# EAGLE board temp_RH_loggers_V2 (EAGLE 9.7.0)
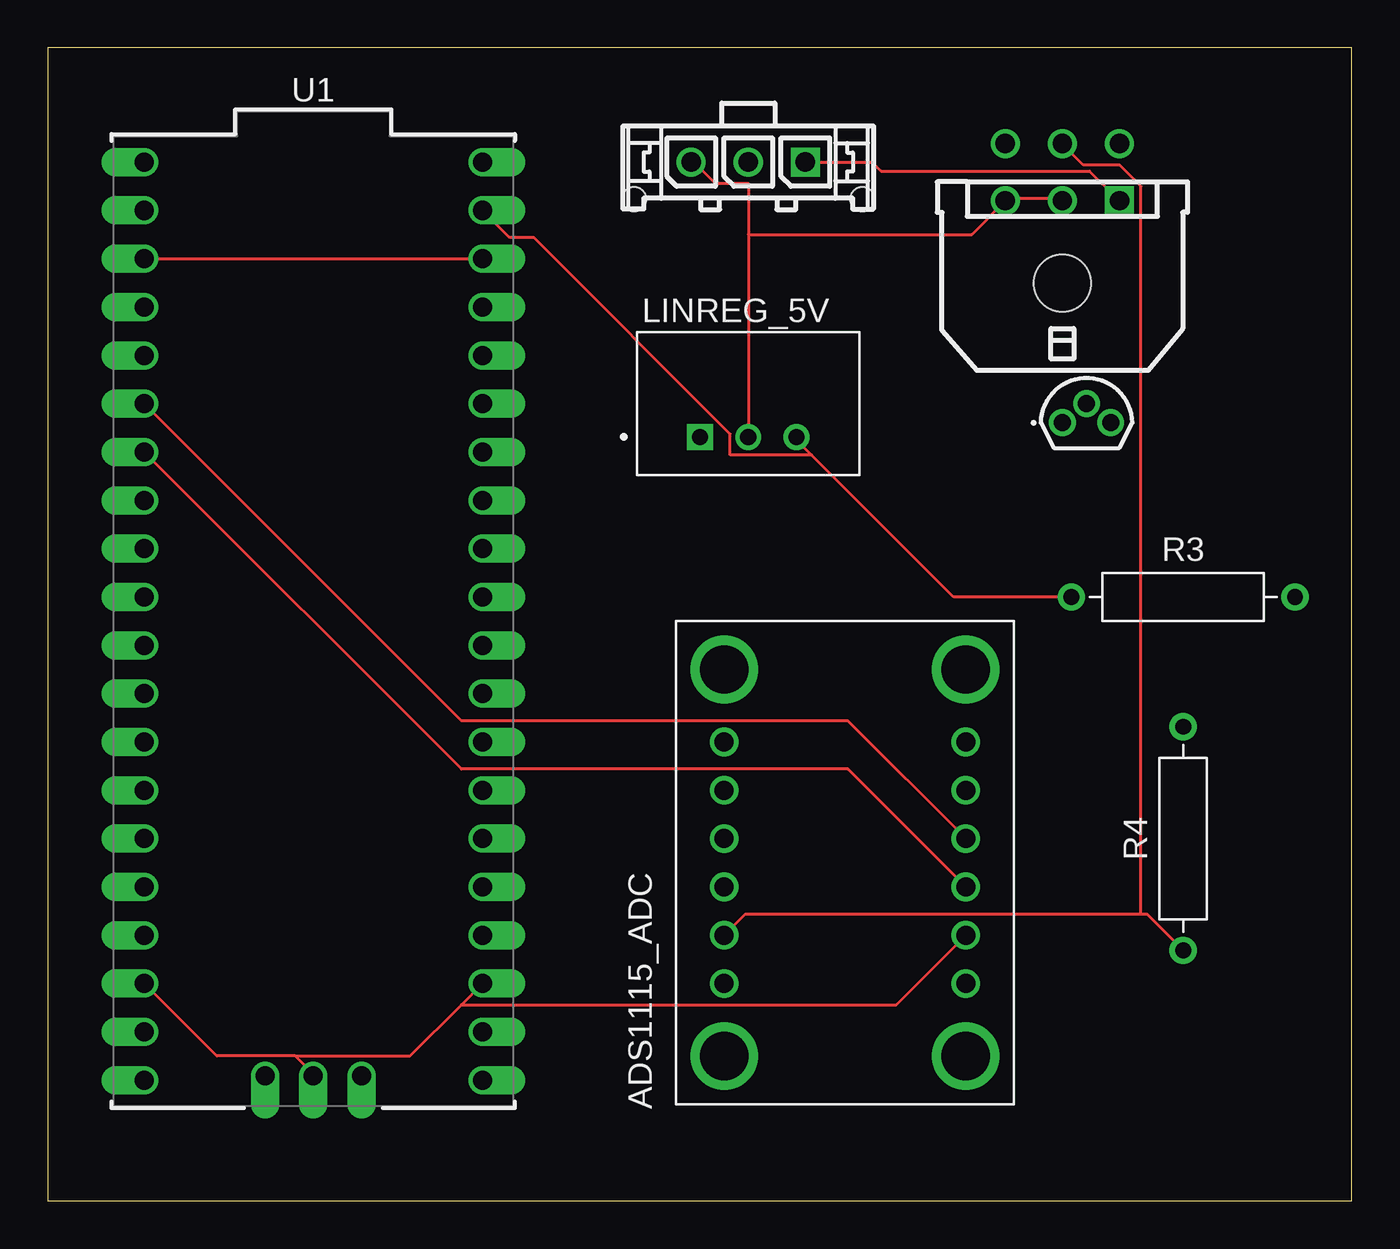
[diagram p0: board, top side]
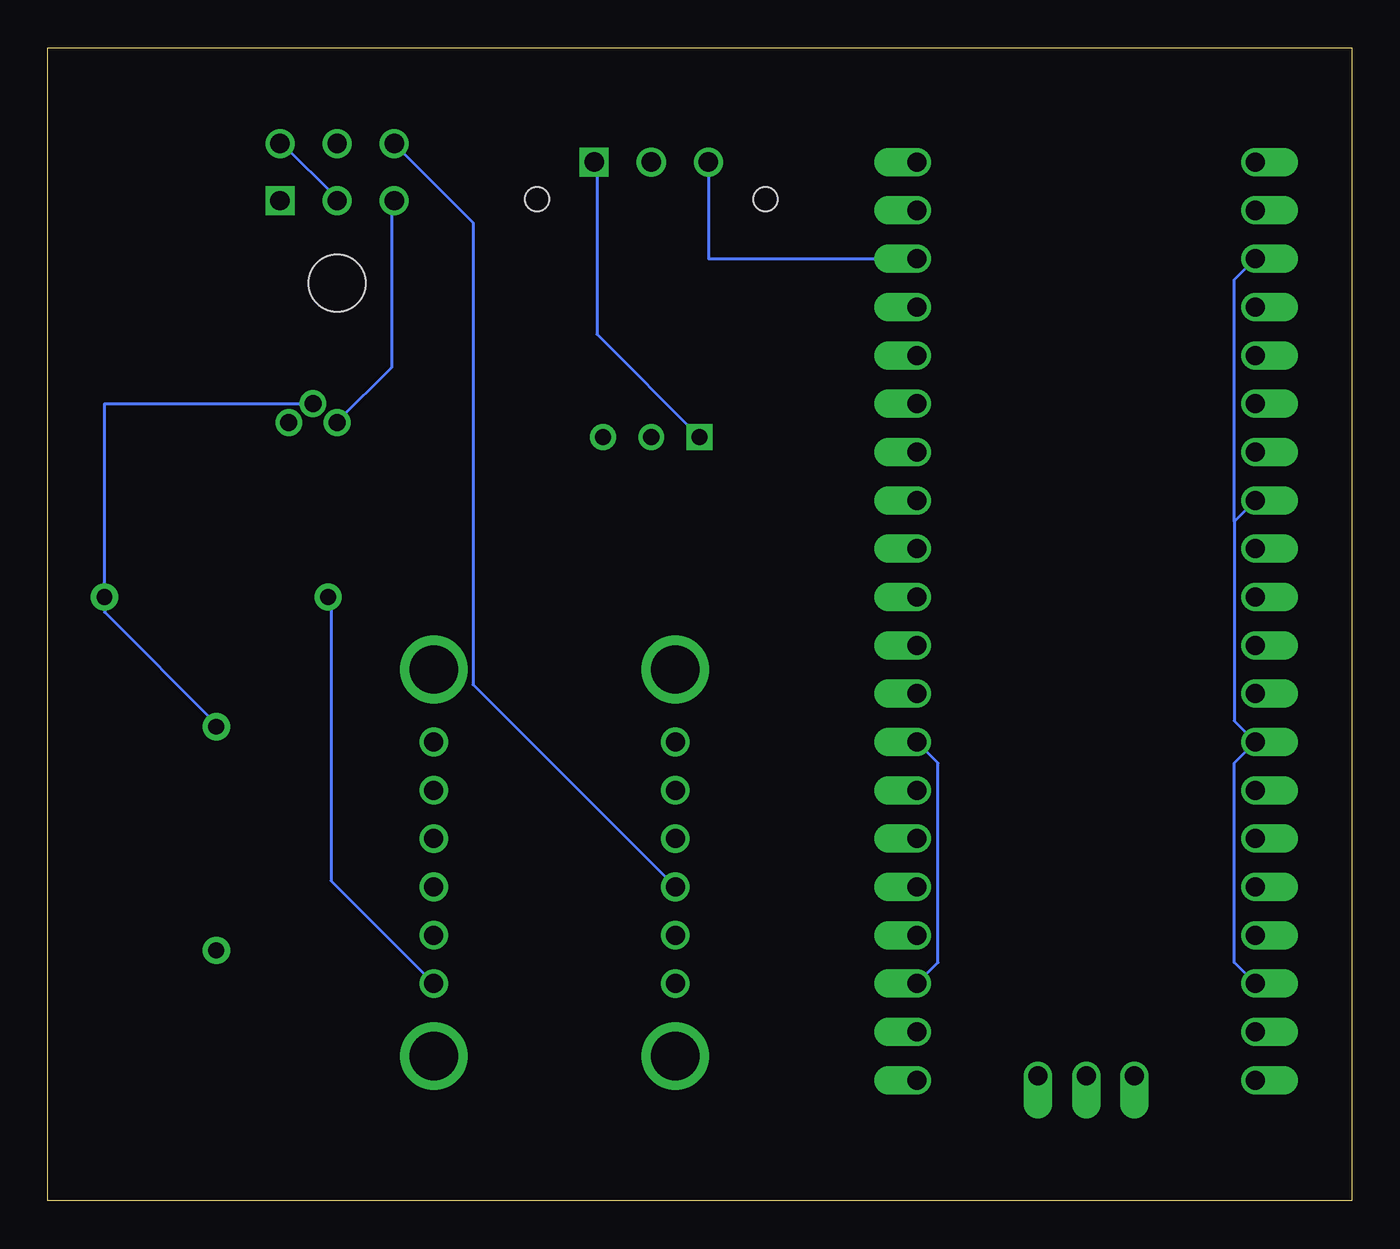
[diagram p1: board, bottom side, seen from below]

Size 68.56 x 60.63 mm. Coordinates in mm from the lower left corner, seen from the top.
Outline: 0,0 68.56,0 68.56,60.63 0,60.63 0,0
Copper layers (1*16): Top 0.035mm / dielectric 1.5mm / Bottom 0.035mm
Design rules "Fusion Electronics Design Rules": minimum track width 6mil, minimum drill 0.35mm, track to track 6mil, track to pad 6mil, pad to pad 6mil, via to via 6mil, smd to smd 6mil, copper to edge 40mil, drill to drill 6mil, minimum pad ring 10mil, minimum via ring 8mil, stop-mask expansion 4mil, vias tented up to drill 9999mil, thermal gap 10mil

## Footprints (pad centres in the part's own frame; a part is rotated, then mirrored left to right if it is on the bottom)
MODULE_1085 = drill 1: JP1_1 -6.35,6.35; JP1_2 -3.81,6.35; JP1_3 -1.27,6.35; JP1_4 1.27,6.35; JP1_5 3.81,6.35; JP1_6 6.35,6.35; JP2_1 -6.35,-6.35; JP2_2 -3.81,-6.35; JP2_3 -1.27,-6.35; JP2_4 1.27,-6.35; JP2_5 3.81,-6.35; JP2_6 6.35,-6.35 | drill 2.54: SH1 -10.16,6.35; SH2 10.16,6.35; SH3 -10.16,-6.35; SH4 10.16,-6.35
LP0003A = drill 0.9 pad 1.4: 1 -1.27,-1; 2 0,0; 3 1.27,-1
CONV_TSR_1-2450 = drill 0.85 square: 1 -2.54,-1.75 | drill 0.85: 2 0,-1.75; 3 2.54,-1.75
43650-0315 = drill 1.02 square: P$1 3,0 | drill 1.02: P$2 0,0; P$3 -3,0 | hole 1.27: 6,-1.96; -6,-1.96
RESAD1176W63L850D250B = drill 0.83 pad 1.43: 1 -5.88,0; 2 5.88,0
43045-0600 = drill 1.02 square: P$1 3,4.32 | drill 1.02: P$2 0,4.32; P$3 -3,4.32; P$4 3,7.32; P$5 0,7.32; P$6 -3,7.32 | hole 3: 0,0
PI_PICO_H = drill 1 offset: 1 -8.89,24.13; 2 -8.89,21.59; 3 -8.89,19.05; 4 -8.89,16.51; 5 -8.89,13.97; 6 -8.89,11.43; 7 -8.89,8.89; 8 -8.89,6.35; 9 -8.89,3.81; 10 -8.89,1.27; 11 -8.89,-1.27; 12 -8.89,-3.81; 13 -8.89,-6.35; 14 -8.89,-8.89; 15 -8.89,-11.43; 16 -8.89,-13.97; 17 -8.89,-16.51; 18 -8.89,-19.05; 19 -8.89,-21.59; 20 -8.89,-24.13; 21 8.89,-24.13; 22 8.89,-21.59; 23 8.89,-19.05; 24 8.89,-16.51; 25 8.89,-13.97; 26 8.89,-11.43; 27 8.89,-8.89; 28 8.89,-6.35; 29 8.89,-3.81; 30 8.89,-1.27; 31 8.89,1.27; 32 8.89,3.81; 33 8.89,6.35; 34 8.89,8.89; 35 8.89,11.43; 36 8.89,13.97; 37 8.89,16.51; 38 8.89,19.05; 39 8.89,21.59; 40 8.89,24.13; D1 -2.54,-23.9; D2 0,-23.9; D3 2.54,-23.9

## Placement (x,y rotation side)
ADS1115_ADC  1085  [MODULE_1085]  41.91,17.78 90 top
IC1  LM4040AIZ-2.5_NOPB  [LP0003A]  54.61,41.91 0 top
LINREG_5V  TSR_1-2450  [CONV_TSR_1-2450]  36.83,41.91 0 top
POWER_HEADER  [43650-0315]  36.83,54.61 0 top
R3  4700  [RESAD1176W63L850D250B]  59.69,31.75 0 top
R4  18700  [RESAD1176W63L850D250B]  59.69,19.05 90 top
TEMP/RH_HEADER  [43045-0600]  53.34,48.26 0 top
U1  RPI_PICO_H  [PI_PICO_H]  13.97,30.48 0 top

## Library data of the parts
ADS1115_ADC = 1085; AVAILABILITY: In Stock; CHECK_PRICES: https://www.snapeda.com/parts/1085/Adafruit+Industries/view-part/?ref=eda; DESCRIPTION: ADS1115 series 16 Bit 860 Samples per Second Analog to Digital Converter (ADC) Evaluation Board; MF: Adafruit Industries; MP: 1085; PACKAGE: NON STANDARD-16 Adafruit; PRICE: None; PURCHASE-URL: https://www.snapeda.com/api/url_track_click_mouser/?unipart_id=378491&manufacturer=Adafruit Industries&part_name=1085&search_term=None; SNAPEDA_LINK: https://www.snapeda.com/parts/1085/Adafruit+Industries/view-part/?ref=snap
IC1 = LM4040AIZ-2.5_NOPB; DESCRIPTION: 100-ppm/C precision micropower shunt voltage reference; HEIGHT: mm; MANUFACTURER_NAME: Texas Instruments; MANUFACTURER_PART_NUMBER: LM4040AIZ-2.5/NOPB; MOUSER_PART_NUMBER: 926-LM4040AIZ25NOPB; MOUSER_PRICE-STOCK: https://www.mouser.co.uk/ProductDetail/Texas-Instruments/LM4040AIZ-2.5-NOPB?qs=QbsRYf82W3Ggji8pDqIALQ%3D%3D
LINREG_5V = TSR_1-2450; AVAILABILITY: In Stock; CHECK_PRICES: https://www.snapeda.com/parts/TSR%201-2450/Traco+Power/view-part/?ref=eda; DESCRIPTION: 1 Amp POL switching regulator, wide input range, pos.-pos. circuit, LM78 compatible, SIP-3; MF: Traco Power; MP: TSR 1-2450; PACKAGE: SIP-3 Traco Power; PRICE: None; PURCHASE-URL: https://www.snapeda.com/api/url_track_click_mouser/?unipart_id=45147&manufacturer=Traco Power&part_name=TSR 1-2450&search_term=None; SNAPEDA_LINK: https://www.snapeda.com/parts/TSR%201-2450/Traco+Power/view-part/?ref=snap
POWER_HEADER TEMP/RH_HEADER = con-molex-micro-fit-3_0
R3 R4 = Resistor; CATEGORY: Resistors; DESCRIPTION: Axial Resistor 11.76 mm pitch 8.5 mm body length 2.5 mm body diameter; PACKAGE_SIZE: AXIAL; PACKAGE_TYPE: THT
U1 = Development_Boards; CATEGORY_L1: Developement Boards; CATEGORY_L2: Evaluation Boards; DATASHEET: https://pip-assets.raspberrypi.com/categories/610-raspberry-pi-pico/documents/RP-008307-DS-1-pico-datasheet.pdf?disposition=inline; DESCRIPTION: RP2040 Raspberry Pi Pico - ARM® Cortex®-M0+ MCU 32-Bit Embedded Evaluation Board; MANUFACTURER: Raspberry Pi; MPN: SC0917; OPERATING_TEMPERATURE: -20°C ~ 85°C; PACKAGE: Through Hole; PART_STATUS: Active; ROHS: Compliant; SERIES: RP2040

## Nets
+3.3V: U1.36
+5V: ADS1115_ADC.JP2_1 LINREG_5V.3 R3.1 U1.39
+12V: LINREG_5V.1 POWER_HEADER.P$1 TEMP/RH_HEADER.P$1
ADC_VREF: U1.35
AGND: U1.33
GND: ADS1115_ADC.JP2_2 IC1.1 LINREG_5V.2 POWER_HEADER.P$3 TEMP/RH_HEADER.P$2 TEMP/RH_HEADER.P$3 TEMP/RH_HEADER.P$4 U1.3 U1.8 U1.13 U1.18 U1.23 U1.28 U1.38 U1.D2
N$1: IC1.2 R3.2 R4.2
N$2: ADS1115_ADC.JP1_2 R4.1 TEMP/RH_HEADER.P$5
N$3: ADS1115_ADC.JP1_3 TEMP/RH_HEADER.P$6
N$4: ADS1115_ADC.JP2_4 U1.6
N$5: ADS1115_ADC.JP2_3 U1.7
VBUS: U1.40

## Tracks (layer width: path | path; a pad name or v marks a point on that pad's centre or on a via)
+5V
  Top 0.152: 40.16,39.21 47.62,31.75 R3.1 | 40.16,39.21 39.37,40 LINREG_5V.3 | U1.39 24.29,50.64 25.56,50.64 35.88,40.32 35.88,39.21 40.16,39.21
  Bottom 0.152: ADS1115_ADC.JP2_1 53.66,16.83 53.66,31.75 R3.1
+12V
  Top 0.152: POWER_HEADER.P$1 43.34,54.61 43.81,54.13 54.77,54.13 56.2,52.7 TEMP/RH_HEADER.P$1
  Bottom 0.152: LINREG_5V.1 39.69,45.56 39.69,54.61 POWER_HEADER.P$1
GND
  Top 0.152: TEMP/RH_HEADER.P$2 53.34,52.7 50.48,52.7 TEMP/RH_HEADER.P$3 50.32,52.55 48.58,50.8 36.83,50.8 | 36.83,50.8 36.83,53.5 35.08,53.5 33.97,54.61 POWER_HEADER.P$3 | 36.83,50.8 LINREG_5V.2 | U1.18 8.89,7.62 13.02,7.62 | 13.02,7.62 13.97,6.67 U1.D2 | 21.75,10.32 19.05,7.62 13.02,7.62 | 21.75,10.32 U1.23 | ADS1115_ADC.JP2_2 44.61,10.32 21.75,10.32 | U1.3 U1.38
  Bottom 0.152: IC1.1 53.34,40.96 50.48,43.81 50.48,52.55 TEMP/RH_HEADER.P$3 | TEMP/RH_HEADER.P$4 56.2,55.56 53.34,52.7 TEMP/RH_HEADER.P$2 | U1.38 33.81,49.53 33.81,54.61 POWER_HEADER.P$3 | 6.19,35.72 6.19,25.24 U1.13 6.19,23.02 6.19,12.54 U1.18 | U1.8 6.19,35.72 | U1.3 6.19,48.42 6.19,35.72 | U1.28 21.75,23.02 21.75,12.54 U1.23
N$1
  Bottom 0.152: IC1.2 65.56,41.91 R3.2 | R3.2 65.56,30.96 59.69,25.08 R4.2 | R3.2
N$2
  Top 0.152: 57.47,15.08 36.67,15.08 ADS1115_ADC.JP1_2 | 57.47,15.08 57.78,15.08 R4.1 | 57.47,15.08 57.47,53.34 56.36,54.45 54.45,54.45 53.34,55.56 TEMP/RH_HEADER.P$5
N$3
  Bottom 0.152: ADS1115_ADC.JP1_3 46.2,27.15 46.2,51.43 50.32,55.56 TEMP/RH_HEADER.P$6
N$4
  Top 0.152: U1.6 21.75,25.24 42.07,25.24 ADS1115_ADC.JP2_4
N$5
  Top 0.152: U1.7 21.75,22.7 42.07,22.7 ADS1115_ADC.JP2_3